# Altium PCB oled.PcbDoc
Units mil, origin at the board's own origin, x right, y up, seen from the top; angles counter-clockwise.
Board outline 1420 x 1860 mil, 2 copper layers (Top Layer, Bottom Layer); 28 components, 25 nets, 103 pads, 72 vias.
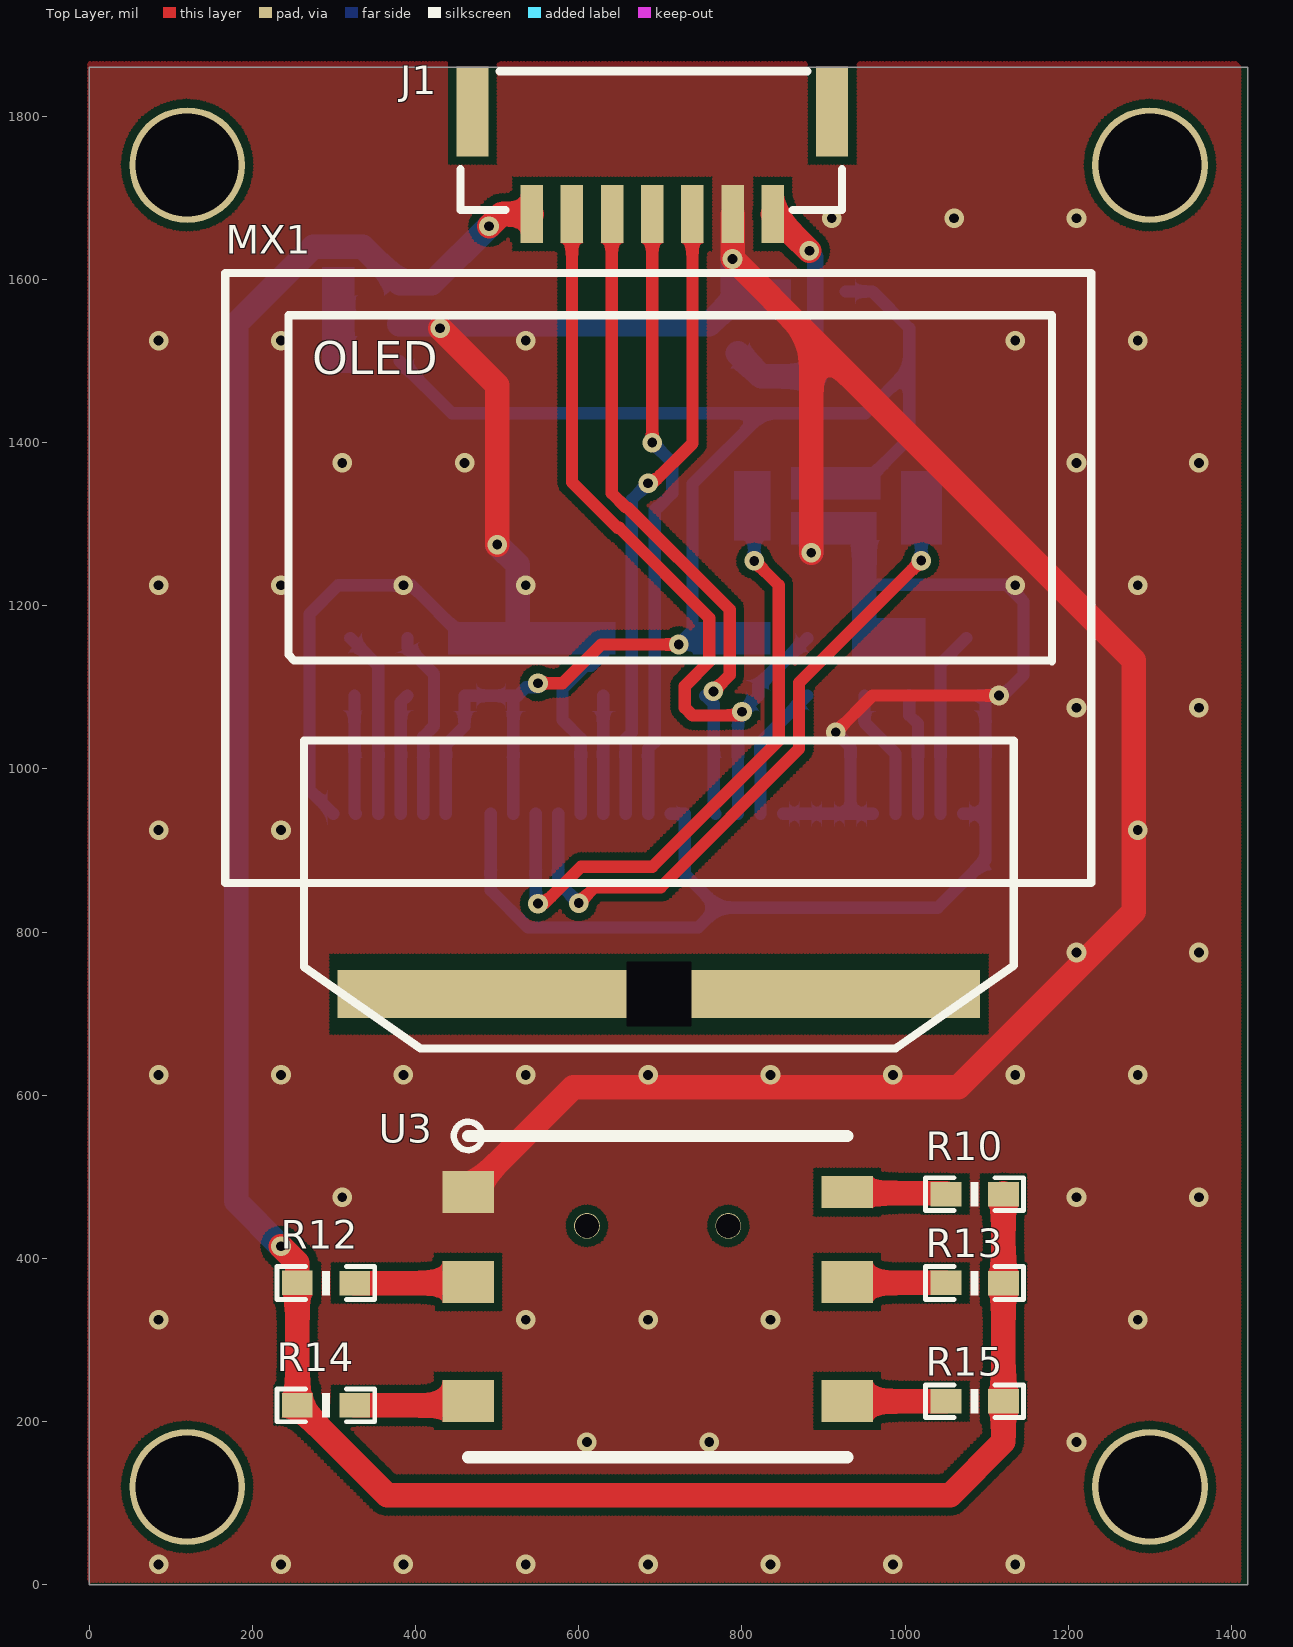
[diagram p0: Top Layer view]
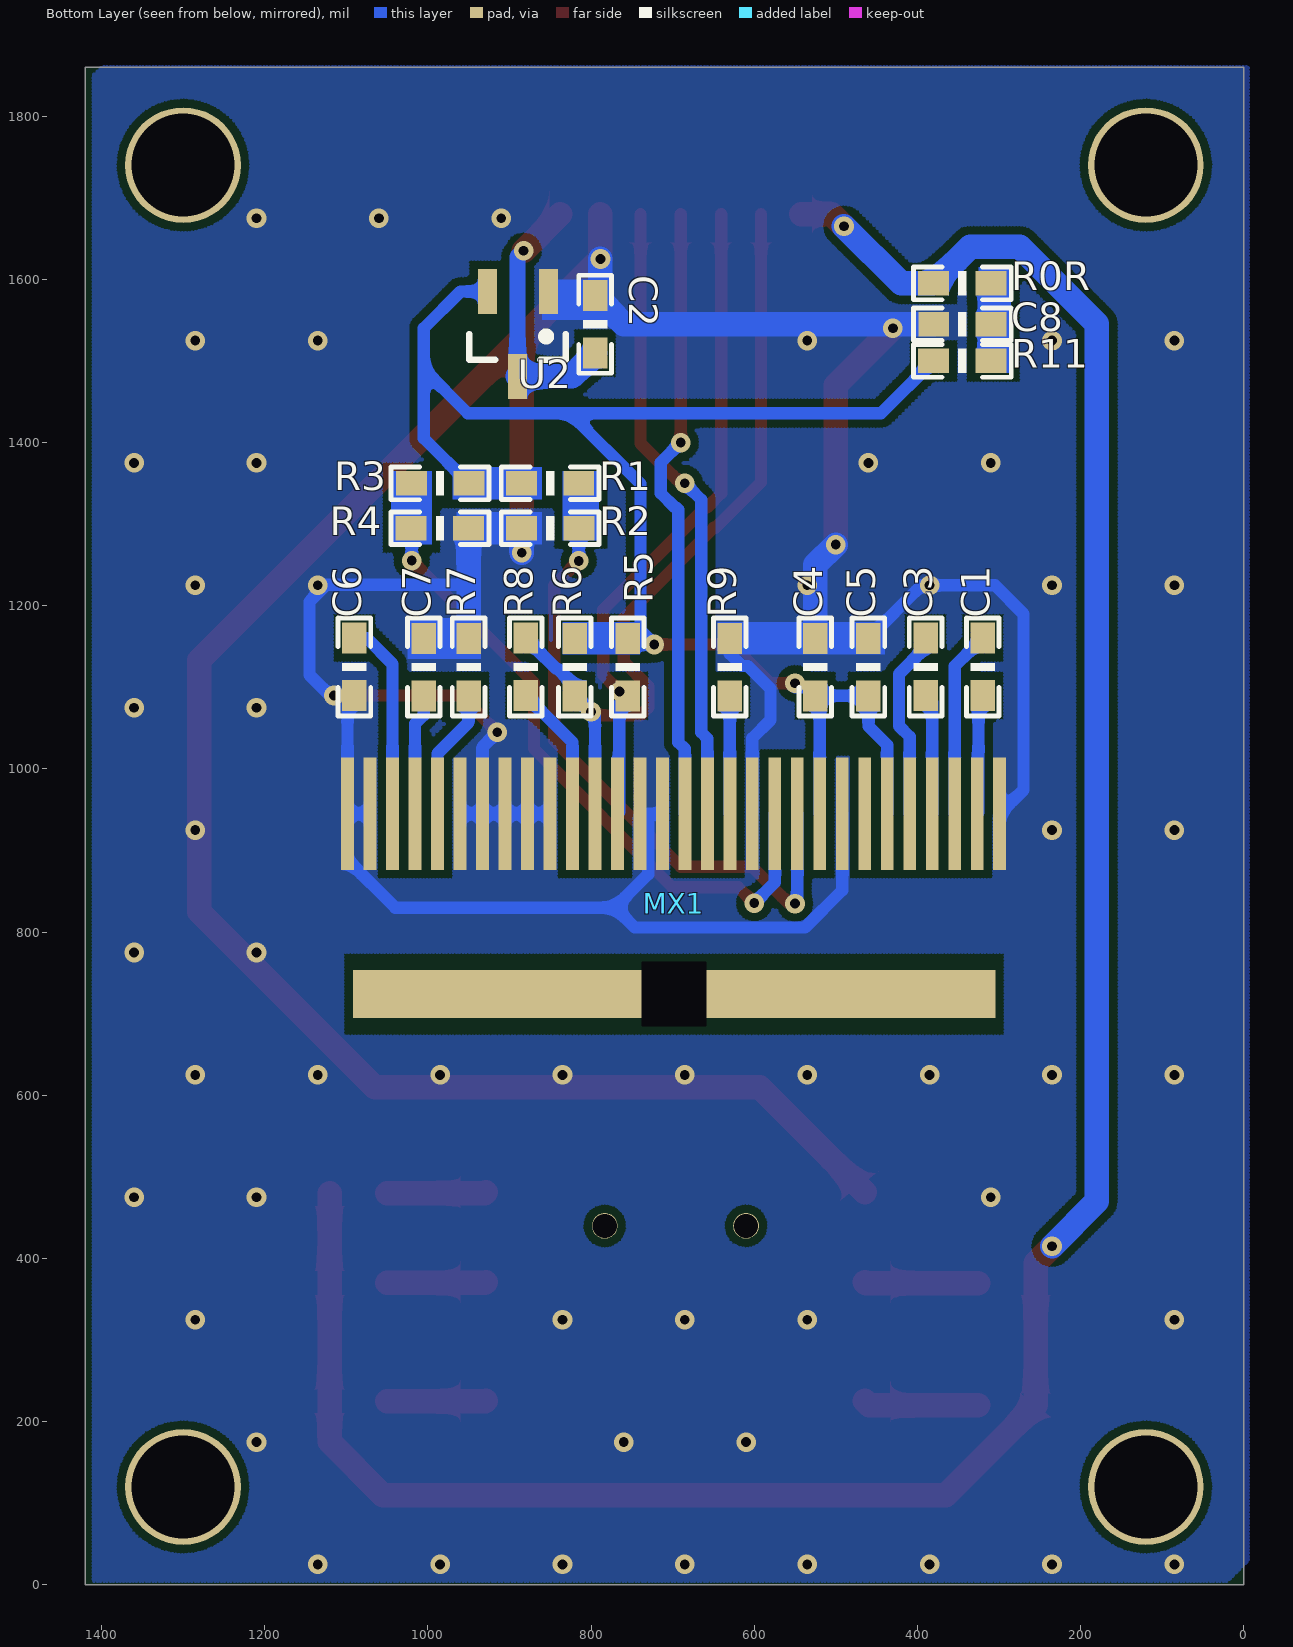
[diagram p1: Bottom Layer view, seen from below]

## Layer stack, top to bottom
Top Solder: solder mask 0.4, Solder Resist, Dk 3.5
Top Layer: signal copper 1.4
Dielectric 1: dielectric 12.6, FR-4, Dk 4.8
Bottom Layer: signal copper 1.4
Bottom Solder: solder mask 0.4, Solder Resist, Dk 3.5

## Board outline
0,0 0,1860 1420,1860 1420,0

## Design rules (kind name [scope] priority, off if disabled: settings)
Clearance Clearance_1 [All] p1: gap=10 ignorepadtopadclearanceinfootprint=FALSE except(0: Arc-Hole Track-Hole SMDPad-Hole THPad-Hole Via-Hole Fill-Hole Poly-Hole Region-Hole Text-Hole)
Clearance [InNetClass('pwoer') vs InNetClass('pwoer')] p2: gap=30 ignorepadtopadclearanceinfootprint=FALSE except(0: Arc-Hole Track-Hole SMDPad-Hole THPad-Hole Via-Hole Fill-Hole Poly-Hole Region-Hole Text-Hole)
DiffPairsRouting [All] p1: maxlimit=20 minlimit=15 mostfreqgap=20 toplayer_minwidth=15 toplayer_maxwidth=15 toplayer_prefwidth=15 bottomlayer_minwidth=15 bottomlayer_maxwidth=15 bottomlayer_prefwidth=15 maxuncoupledlength=500
Length [InNetClass('length')] p1: maxlimit=100000 minlimit=0 usedelayunits=FALSE
PlaneClearance [All] p1: clearance=30
PlaneConnect [All] p1: planeconnectstyle=Direct reliefexpansion=20 reliefentries=4 reliefconductorwidth=10 reliefairgap=10
PolygonConnect [All] p1: connectstyle=Direct reliefconductorwidth=10 reliefentries=4 polygonreliefangle="90 Angle" airgapwidth=10
RoutingVias [All] p1: holewidth=28 width=50 viastyle="Through Hole" minholewidth=10 minwidth=20 maxholewidth=28 maxwidth=50
SolderMaskExpansion [All] p1: expansion=10
Width power [InNetClass('power')] p1: maxlimit=100 minlimit=15 preferedwidth=15
Width [All] p2: maxlimit=10000 minlimit=15 preferedwidth=15
27 further rules are at their usual default settings.

## Components (designator, comment, footprint, x,y, rotation, side; value= is the part's Value field where it differs from the comment)
C1 "1uF" 0603P 320,1125 r90 bottom locked
C2 "1uF" 0603P 795,1545 r270 bottom locked
C3 "1uF" 0603P 390,1125 r90 bottom locked
C4 "1uF" 0603P 525,1125 r270 bottom locked
C5 "1uF" 0603P 460,1125 r270 bottom locked
C6 "2.2uF" 0603P 1090,1125 r90 bottom locked
C7 "4.7uF" 0603P 1005,1125 r270 bottom locked
C8 "1uF" 0603P 345,1545 r180 bottom locked
J1 "CON7" GH1.25-卧贴-7-Pin 837.64,1680 r180 top locked
MX1 "OLED" OLED 1098.17,945 r0 top locked
R0R "0R" 0603P 345,1595 r0 bottom locked
R1 "4.7K" 0603P 850,1350 r0 bottom locked
R2 "4.7K" 0603P 850,1295 r180 bottom locked
R3 "4.7K" 0603P 985,1350 r180 bottom locked
R4 "4.7K" 0603P 985,1295 r0 bottom locked
R5 "4.7K" 0603P 755,1125 r270 bottom locked
R6 "4.7K" 0603P 820,1125 r270 bottom locked
R7 "910K" 0603P 950,1125 r270 bottom locked
R8 "0R" 0603P 880,1125 r90 bottom locked
R9 "0R" 0603P 630,1125 r270 bottom locked
R10 "760K" 0603P 1085,479 r0 top locked
R11 "10K" 0603P 345,1500 r0 bottom locked
R12 "760K" 0603P 290,370 r0 top locked
R13 "760K" 0603P 1085,370 r0 top locked
R14 "760K" 0603P 290,220 r0 top locked
R15 "760K" 0603P 1085,225 r0 top locked
U2 "VOLTREG" SOT-23-3 890,1535 r0 bottom locked
U3 "10*10*9_5_P_BUTTON" 10*10*9_5_P_BUTTON 464.33,481.34 r0 top locked

## Footprints (in the part's own frame and the unit in brackets; to place one, negate y for a bottom-side part, rotate by r counter-clockwise, add the part's x,y. Pads: shape width x height; smd on the part's side, far side on the other; paste and mask are expansions set on the pad)
10*10*9_5_P_BUTTON [mm]
  rect 1.6x1.3 smd: 1(0,0) 2(0,-2.8) 3(0,-6.5) 5(11.8,-2.8) 6(11.8,-6.5)
  rect 1.6x1 smd: 4(11.8,0)
  round 0.8 hole 0.75 unplated: 8(3.7,-1.05) 8(8.1,-1.05)
  silkscreen extent -0.44,-8.25 11.8,2.19
0603P [mil]
  rect 37.87x30 smd: 1(-35,0) 2(35.39,-0.06)
  silkscreen extent -60,-20 60,20
GH1.25-卧贴-7-Pin [mm]
  rect 1x2.8 smd: 0(-1.85,-3.2) 0(9.35,-3.2)
  rect 0.7x1.8 smd: 1(7.5,0) 2(6.25,0) 3(5,0) 4(3.75,0) 5(2.5,0) 6(1.25,0) 7(0,0)
  silkscreen extent -2.16,-4.44 9.72,-0.13
OLED [mm]
  rect 0.4x3.5 smd far side: 1(-20.295,0) 2(-19.595,0) 3(-18.895,0) 4(-18.195,0) 5(-17.495,0) 6(-16.795,0) 7(-16.095,0) 8(-15.395,0) 9(-14.695,0) 10(-13.995,0) 11(-13.295,0) 12(-12.595,0) 13(-11.895,0) 14(-11.195,0) 15(-10.495,0) 16(-9.795,0) 17(-9.095,0) 18(-8.395,0) 19(-7.695,0) 20(-6.995,0) 21(-6.295,0) 22(-5.595,0) 23(-4.895,0) 24(-4.195,0) 25(-3.495,0) 26(-2.795,0) 27(-2.095,0) 28(-1.395,0) 29(-0.695,0) 30(0.005,0)
  rect 20x1.5 hole 2 square unplated: 50(-10.16,-5.613)
  silkscreen extent -23.66,-7.3 3.3,16.84
SOT-23-3 [mil]
  rect 23.62x55 smd: 1(-38,-50) 2(37,-50) 3(0,54)
  silkscreen extent -59,0 59,33, body extent -57,-55 57,55, height 47

## Part data
C1 C2 C3 C4 C5 C6 C7 C8: library part C
J1: "连接器"
R0R R1 R2 R3 R4 R5 R6 R7 R8 R9 R10 R11 R12 R13 R14 R15: library part R
U2: "三端稳压"

## Free pads (board coordinates)
  round 141.73 hole 125.98 unplated: 0(120,120) 0(120,1740) 0(1300,120) 0(1300,1740)

## Via types
v1: diameter 24, hole 12, Top Layer to Bottom Layer, 53 vias
v2: diameter 24, hole 12, Top Layer to Bottom Layer, tented both sides, 19 vias

## Nets (pads, with @x,y where several pads share a name; then routed paths per layer and width w, separated by ;. In a path a pad name is that pad's centre, name@x,y a point inside that pad or via, vN(x,y) a via of type N, cw(c..) or ccw(c..) an arc to the next point about the centre after c; other vN are vias at no path point)
BS0: MX1.10 R1.1 R2.2 | length 816.4
  Top Layer w15: v2(550,835) 557.73,835 602.73,880 690,880 845,1035 845,1225 v2(815,1255)
  Bottom Layer w15: MX1.10 547.2,837.8 v2(550,835) ; v2(815,1255) R1.1
BS1: MX1.11 R3.1 R4.2 | length 855.7
  Top Layer w15: v2(600,835.55) 619.45,855 700.36,855 870,1024.64 870,1105.55 v2(1019.72,1255.28)
  Bottom Layer w15: MX1.11 574.76,860.79 v2(600,835.55) ; v2(1019.72,1255.28) 1019.72,1349.72 R3.1
Button_AD: J1.1 R0R.2 R10.2 R12.1 R13.2 R14.1 R15.2 | length 3054.4
  Top Layer w30: v2(235,415) 255,395 R12.1 R14.1 365,110 1055,110 1120.39,175.39 R15.2 R13.2 R10.2@1120.39,479.94 ; v2(490,1665) 505,1680 J1.1
  Bottom Layer w30: v2(235,415) 180,470 180,1545.36 274.64,1640 335.46,1640 R0R.2 420.06,1595.06 v2(490,1665)
D0: J1.3 MX1.18 R5.2 | length 804.3
  Top Layer w15: J1.3 640.5,1679.71 640.5,1337.78 657.78,1320.5 659.86,1320.5 785,1195.36 785,1115 v2(765,1095)
  Bottom Layer w15: R5.2 765.49,1079.18 765.49,947.18 MX1.18
D1: J1.2 MX1.19 R6.2 R8.2 | length 1018.6
  Top Layer w15: J1.2 591.57,1351.35 647.43,1295.5 649.5,1295.5 760,1185 760,1131.72 730,1101.72 730,1075 739.5,1065.5 777.22,1065.5 777.28,1065.56 800,1065.56 v2(800,1070)
  Bottom Layer w15: MX1.19 795.24,1064.78 R6.2 820.06,1102.56 840,1122.5 842.25,1122.5 879.94,1160.19 R8.2
DC: J1.4 MX1.15 | length 758.4
  Top Layer w15: v2(690,1400) J1.4
  Bottom Layer w15: MX1.15 685,1024.64 693,1032.64 693,1318 695.5,1320.5 697.22,1320.5 714.5,1337.78 714.5,1375.5 v2(690,1400)
GND: C2.1 C4.1 C5.1 C6.1 C7.1 C8.1 J1.6 MX1.1 MX1.8 MX1.12 MX1.16 MX1.17 MX1.21 MX1.22 MX1.23 MX1.24 MX1.25 MX1.29 MX1.30 R2.1 R4.1 R7.1 R9.1 U2.1 U3.1 | length 6013.8
  Top Layer w15: v2(915,1045) 960,1090 v2(1115,1090)
  Top Layer w30: v2(430,1540) 500,1470 v2(500,1275) ; U3.1 592.99,610 1065,610 1280,825 1280,1133.43 885,1528.43 ; J1.6 v2(788.43,1625) 885,1528.43 ; v2(885,1265) 885,1528.43
  Bottom Layer w15: MX1.1 270,974.17 270,1190 305,1225 v1(385,1225) 395,1225 C5.1 ; MX1.8 492.09,851.19 537.78,805.5 746.41,805.5 770.91,830 ; MX1.12 602.32,1037.68 580,1060 580,1098.23 607.82,1126.04 615,1126.04 630,1141.04 R9.1 ; MX1.16 730,945 730,870.91 770.91,830 ; MX1.21 MX1.22 MX1.23 MX1.24 ; v2(915,1045) 933.03,1026.97 MX1.24 ; 950,1235 959.22,1225.78 1124.22,1225.78 1145,1205 1145,1115 1120,1090 v2(1115,1090) C6.1 1098.39,1081.61 MX1.30 ; MX1.25 MX1.24 ; MX1.29 MX1.30 ; 770.91,830 1040,830 1098.39,888.39 MX1.30
  Bottom Layer w30: C8.1 760,1545 C2.1 788.43,1586.57 v2(788.43,1625) ; v2(500,1275) 525,1250 C4.1 ; v2(885,1265) R2.1 ; R7.1 950,1235 R4.1
  other v1: 85,25 235,25 385,25 535,25 685,25 835,25 985,25 1135,25 610,175 760,175 1210,175 85,325 535,325 685,325 835,325 1285,325 310,475 1210,475 1360,475 85,625 235,625 385,625 535,625 685,625 835,625 985,625 1135,625 1285,625 1210,775 1360,775 85,925 235,925 1285,925 1210,1075 1360,1075 85,1225 235,1225 535,1225 1135,1225 1285,1225 310,1375 460,1375 1210,1375 1360,1375 85,1525 235,1525 535,1525 1135,1525 1285,1525 910,1675 1060,1675 1210,1675
NetC1_1: C1.1 MX1.2 | length 145.7
  Bottom Layer w15: C1.1@325,1090 325,946.73 MX1.2
NetC1_2: C1.2 MX1.3 | length 229.6
  Bottom Layer w15: C1.2 354.29,1126.04 MX1.3
NetC3_1: C3.1 MX1.4 | length 148.4
  Bottom Layer w15: MX1.4 381.85,1081.85 C3.1
NetC3_2: C3.2 MX1.5 | length 234.3
  Bottom Layer w15: C3.2 389.94,1148.75 422.5,1116.19 422.5,1052.5 409.41,1039.41 MX1.5
NetC6_2: C6.2 MX1.28 | length 228.5
  Bottom Layer w15: MX1.28 1043.27,1128.73 C6.2@1074.94,1160.39
NetC7_2: C7.2 MX1.27 | length 149
  Bottom Layer w15: C7.2 1005.06,1065.9 1015.71,1055.25 MX1.27
NetC8_2: C8.2 R0R.1 R11.1 | length 95
  Bottom Layer w30: R11.1 R0R.1
NetMX1_13: MX1.13 R9.2 | length 144.7
  Bottom Layer w15: MX1.13 629.88,1089.42 R9.2
NetMX1_20: MX1.20 R8.1 | length 168.7
  Bottom Layer w15: MX1.20 822.8,1032.8 R8.1
NetMX1_26: MX1.26 R7.2 | length 160.4
  Bottom Layer w15: R7.2 950.06,1057.05 988.15,1018.96 MX1.26
NetR10_1: R10.1 U3.4 | length 121.7
  Top Layer w30: U3.4 930.24,480 R10.1@1050,480
NetR12_2: R12.2 U3.2 | length 139.4
  Top Layer w30: R12.2 463.16,369.94 U3.2
NetR13_1: R13.1 U3.5 | length 121.6
  Top Layer w30: U3.5 930,370 R13.1
NetR14_2: R14.2 U3.3 | length 141.2
  Top Layer w30: R14.2 458.83,219.94 U3.3
NetR15_1: R15.1 U3.6 | length 121.3
  Top Layer w30: U3.6 929.33,225 R15.1
RES: J1.5 MX1.14 | length 764.9
  Top Layer w15: v2(685,1350) 690.36,1350 739.21,1398.86 J1.5
  Bottom Layer w15: MX1.14 657.44,1037.44 665,1045 665,1330 v2@680,1345
VCC: C4.2 C5.2 MX1.6 MX1.9 R1.2 R3.2 R5.1 R6.1 R11.2 U2.2 | length 1937.6
  Top Layer w15: v2(550,1105) 580,1105 627.5,1152.5 v2(722.5,1152.5)
  Bottom Layer w15: R11.2 444.46,1436 826,1436 ; MX1.6 436.97,1029.21 460.06,1052.31 C5.2 C4.2 ; MX1.9 519.65,1084.19 C4.2 ; v2(550,1105) 550,1100 540,1100 535.46,1100 C4.2 ; R5.1 747.5,1152.5 v2(722.5,1152.5) 739.5,1169.5 739.5,1349.5 826,1436 ; U2.2 960,1585 1005,1540 1005,1490 ; R3.2 1005,1405.33 1005,1490 ; 826,1436 951,1436 1005,1490
VCC_IN: C2.2 J1.7 U2.3 | length 327.5
  Top Layer w30: J1.7 v2(882.64,1635)
  Bottom Layer w20: v2(882.64,1635) 890,1627.64 U2.3
  Bottom Layer w30: C2.2 823.67,1481 U2.3
pads on no net: J1.0 MX1.7 MX1.50 U3.8

## Polygon pours and split planes (outlines as drawn)
GND on Top Layer "NONET_L-01_P-001" (hatched 90Degree grid 4 track 5, remove dead copper, pour order 16): 5,5 1410,5 1410,1860 1405,1865 0,1865 0,5 5,0
no net on Bottom Layer "Bottom Layer-No Net" (solid, remove dead copper, pour order 20): 790,1365
GND on Bottom Layer "NONET_L-01_P-001" (hatched 90Degree grid 4 track 5, remove dead copper, pour order 18): 1410,5 1410,1850 1400,1860 -5,1860 -5,30 20,5

## Other copper
Bottom Layer:
  region net GND: 1025,1185 935,1185 935,1135 1025,1135
  region net VCC: 835,1180 740,1180 740,1140 835,1140
  region net GND: 645,1180 440,1180 440,1140 645,1140
  region net BS1: 1045,1365 995,1365 995,1275 1045,1275
  region net BS0: 835,1365 790,1365 790,1280 835,1280
  region net GND: 965,1315 860,1315 860,1275 965,1275
  region net VCC: 970,1370 860,1370 860,1330 970,1330
  region net NetC8_2: 325,1615 285,1615 285,1485 325,1485
  region net GND: 860,1600 780,1600 780,1550 860,1550
  pour cut-out: 460.06,1070.79 460.06,1015.06 460,1015 461.07,1013.93 511.94,1013.93
  pour cut-out: 790,1365 790,1317.5 1047.5,1317.5 1045,1320 1045,1365

## Silkscreen, mask and mechanical layers (free items; w line width, h text height)
Mechanical 1:
  the board outline again, w6
Drill Drawing:
  the board outline again, w10